# EAGLE board protoAndPower (EAGLE 9.2.2)
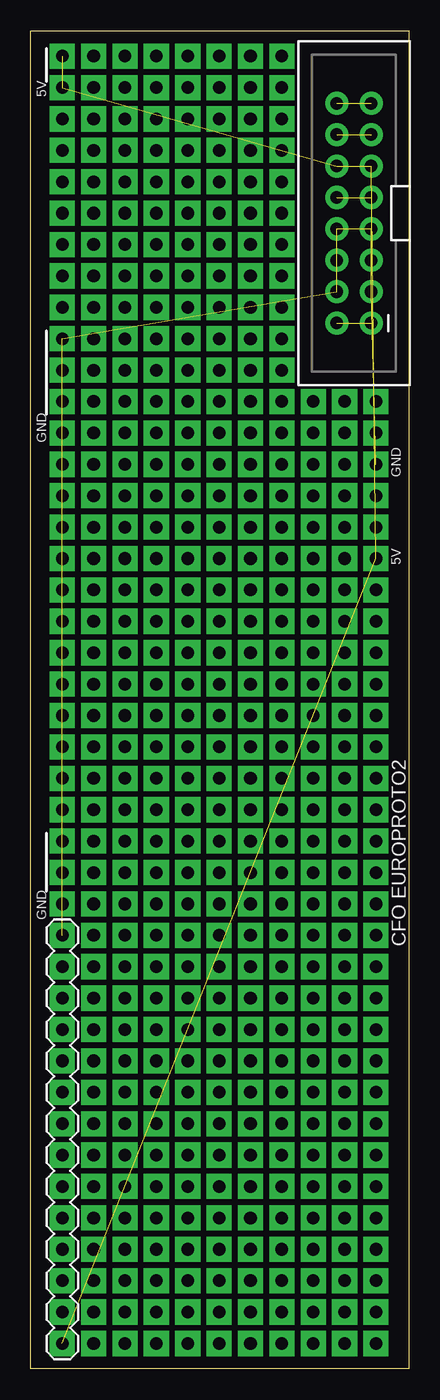
[diagram p0: board, top side]
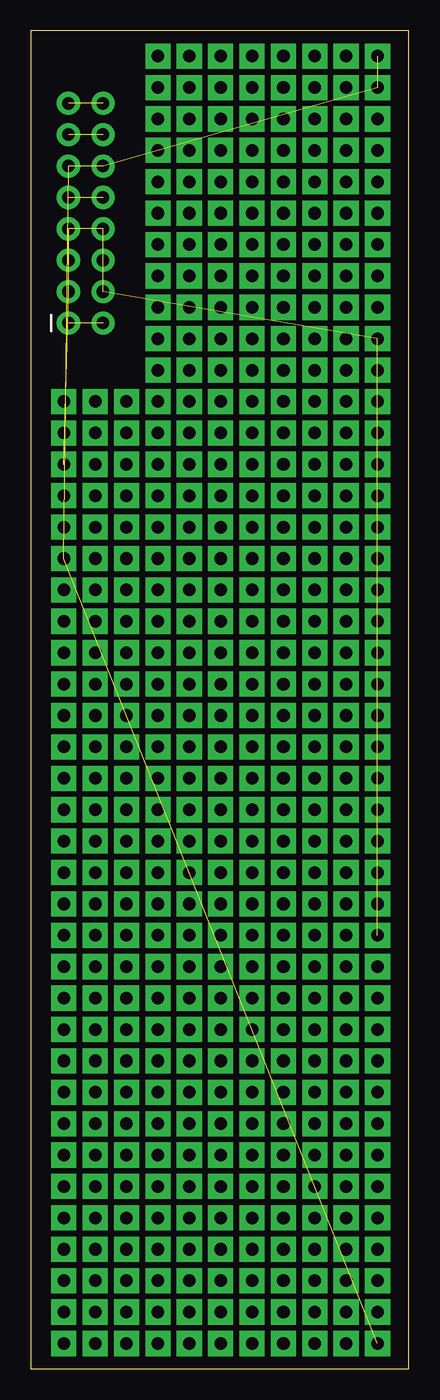
[diagram p1: board, bottom side, seen from below]

Size 30.61 x 108.22 mm. Coordinates in mm from the lower left corner, seen from the top.
Outline: 30.61,0 0,0 0,108.22 30.61,108.22 30.61,0
Copper layers (1*16): Top 0.035mm / dielectric 1.5mm / Bottom 0.035mm
Design rules "default": minimum track width 6mil, minimum drill 0.35mm, track to track 6mil, track to pad 6mil, pad to pad 6mil, via to via 6mil, smd to smd 6mil, copper to edge 40mil, drill to drill 6mil, minimum pad ring 10mil, minimum via ring 8mil, stop-mask expansion 4mil, vias tented up to drill 0mil, thermal gap 10mil

## Footprints (pad centres in the part's own frame; a part is rotated, then mirrored left to right if it is on the bottom)
1X04 = drill 1.016 pad 2.032 square: 1 0,0; 2 2.54,0; 3 5.08,0; 4 7.62,0
1X14 = drill 1.016 pad 2.032 square: 1 0,0; 2 2.54,0; 3 5.08,0; 4 7.62,0; 5 10.16,0; 6 12.7,0; 7 15.24,0; 8 17.78,0; 9 20.32,0; 10 22.86,0; 11 25.4,0; 12 27.94,0; 13 30.48,0; 14 33.02,0
2X8-SHROUDED_LOCK = drill 1.016 pad 1.88: 1 -1.397,8.89; 2 1.397,8.89; 3 -1.397,6.35; 4 1.397,6.35; 5 -1.397,3.81; 6 1.397,3.81; 7 -1.397,1.27; 8 1.397,1.27; 9 -1.397,-1.27; 10 1.397,-1.27; 11 -1.397,-3.81; 12 1.397,-3.81; 13 -1.397,-6.35; 14 1.397,-6.35; 15 -1.397,-8.89; 16 1.397,-8.89
1X01 = drill 1.016 pad 2.032 square: 1 0,0

## Placement (x,y rotation side)
J1  [1X04]  27.94,73.15 270 top
J2  [1X14]  2.54,35.05 270 top
J3  [2X8-SHROUDED_LOCK]  26.16,93.47 180 top
J4  [1X01]  2.54,106.17 0 top
J5  [1X01]  2.54,103.63 0 top
J28  [1X01]  2.54,83.31 0 top
J29  [1X01]  2.54,42.67 0 top
J31  [1X01]  2.54,80.77 0 top
J34  [1X01]  2.54,78.23 0 top
J37  [1X01]  2.54,75.69 0 top
J39  [1X01]  2.54,40.13 0 top
J42  [1X01]  2.54,37.59 0 top

## Library data of the parts
J1 = CFO; PROD_ID: CONN-09696; SPICEPREFIX: E
J2 = CFO; SPICEPREFIX: X
J3-J5 J28 J29 J31 J34 J37 J39 J42 = CFO

## Nets
5V: J1.4 J2.14 J3.11 J3.12 J4.1 J5.1
12V: J3.9 J3.10
CV: J3.13 J3.14
GATE: J3.15 J3.16
GND: J1.1 J2.1 J3.3 J3.4 J3.5 J3.6 J3.7 J3.8 J28.1 J29.1 J31.1 J34.1 J37.1 J39.1 J42.1
N$185: J1.3
N$186: J1.2
POT1: J2.2
POT2: J2.3
POT3: J2.4
VEE: J3.1 J3.2

## Tracks (layer width: path | path; a pad name or v marks a point on that pad's centre or on a via)
5V  (5 unrouted)
12V  (1 unrouted)
CV  (1 unrouted)
GATE  (1 unrouted)
GND  (14 unrouted)
N$1  (via drill 1.02 pad 2.03)
  other vias: 2.54,73.15
N$2  (via drill 1.02 pad 2.03)
  other vias: 5.08,73.15
N$3  (via drill 1.02 pad 2.03)
  other vias: 5.08,2.03
N$4  (via drill 1.02 pad 2.03)
  other vias: 7.62,73.15
N$5  (via drill 1.02 pad 2.03)
  other vias: 7.62,2.03
N$6  (via drill 1.02 pad 2.03)
  other vias: 10.16,2.03
N$7  (via drill 1.02 pad 2.03)
  other vias: 10.16,4.57
N$8  (via drill 1.02 pad 2.03)
  other vias: 7.62,4.57
N$9  (via drill 1.02 pad 2.03)
  other vias: 10.16,73.15
N$10  (via drill 1.02 pad 2.03)
  other vias: 5.08,4.57
N$11  (via drill 1.02 pad 2.03)
  other vias: 5.08,7.11
N$12  (via drill 1.02 pad 2.03)
  other vias: 7.62,7.11
N$13  (via drill 1.02 pad 2.03)
  other vias: 10.16,7.11
N$14  (via drill 1.02 pad 2.03)
  other vias: 10.16,9.65
N$15  (via drill 1.02 pad 2.03)
  other vias: 7.62,9.65
N$16  (via drill 1.02 pad 2.03)
  other vias: 5.08,9.65
N$17  (via drill 1.02 pad 2.03)
  other vias: 5.08,12.19
N$18  (via drill 1.02 pad 2.03)
  other vias: 7.62,12.19
N$19  (via drill 1.02 pad 2.03)
  other vias: 10.16,12.19
N$20  (via drill 1.02 pad 2.03)
  other vias: 10.16,14.73
N$21  (via drill 1.02 pad 2.03)
  other vias: 7.62,14.73
N$22  (via drill 1.02 pad 2.03)
  other vias: 5.08,14.73
N$23  (via drill 1.02 pad 2.03)
  other vias: 5.08,17.27
N$24  (via drill 1.02 pad 2.03)
  other vias: 7.62,17.27
N$25  (via drill 1.02 pad 2.03)
  other vias: 10.16,17.27
N$26  (via drill 1.02 pad 2.03)
  other vias: 10.16,19.81
N$27  (via drill 1.02 pad 2.03)
  other vias: 7.62,19.81
N$28  (via drill 1.02 pad 2.03)
  other vias: 5.08,19.81
N$29  (via drill 1.02 pad 2.03)
  other vias: 5.08,22.35
N$30  (via drill 1.02 pad 2.03)
  other vias: 7.62,22.35
N$31  (via drill 1.02 pad 2.03)
  other vias: 10.16,22.35
N$32  (via drill 1.02 pad 2.03)
  other vias: 10.16,24.89
N$33  (via drill 1.02 pad 2.03)
  other vias: 7.62,24.89
N$34  (via drill 1.02 pad 2.03)
  other vias: 5.08,24.89
N$35  (via drill 1.02 pad 2.03)
  other vias: 5.08,27.43
N$36  (via drill 1.02 pad 2.03)
  other vias: 7.62,27.43
N$37  (via drill 1.02 pad 2.03)
  other vias: 10.16,27.43
N$38  (via drill 1.02 pad 2.03)
  other vias: 10.16,29.97
N$39  (via drill 1.02 pad 2.03)
  other vias: 7.62,29.97
N$40  (via drill 1.02 pad 2.03)
  other vias: 5.08,29.97
N$41  (via drill 1.02 pad 2.03)
  other vias: 5.08,32.51
N$42  (via drill 1.02 pad 2.03)
  other vias: 7.62,32.51
N$43  (via drill 1.02 pad 2.03)
  other vias: 10.16,32.51
N$44  (via drill 1.02 pad 2.03)
  other vias: 10.16,35.05
N$45  (via drill 1.02 pad 2.03)
  other vias: 7.62,35.05
N$46  (via drill 1.02 pad 2.03)
  other vias: 5.08,35.05
N$47  (via drill 1.02 pad 2.03)
  other vias: 5.08,37.59
N$48  (via drill 1.02 pad 2.03)
  other vias: 7.62,37.59
N$49  (via drill 1.02 pad 2.03)
  other vias: 10.16,37.59
N$50  (via drill 1.02 pad 2.03)
  other vias: 10.16,40.13
N$51  (via drill 1.02 pad 2.03)
  other vias: 7.62,40.13
N$52  (via drill 1.02 pad 2.03)
  other vias: 5.08,40.13
N$53  (via drill 1.02 pad 2.03)
  other vias: 5.08,42.67
N$54  (via drill 1.02 pad 2.03)
  other vias: 7.62,42.67
N$55  (via drill 1.02 pad 2.03)
  other vias: 10.16,42.67
N$56  (via drill 1.02 pad 2.03)
  other vias: 10.16,45.21
N$57  (via drill 1.02 pad 2.03)
  other vias: 7.62,45.21
N$58  (via drill 1.02 pad 2.03)
  other vias: 5.08,45.21
N$59  (via drill 1.02 pad 2.03)
  other vias: 2.54,45.21
N$60  (via drill 1.02 pad 2.03)
  other vias: 2.54,47.75
N$61  (via drill 1.02 pad 2.03)
  other vias: 5.08,47.75
N$62  (via drill 1.02 pad 2.03)
  other vias: 7.62,47.75
N$63  (via drill 1.02 pad 2.03)
  other vias: 10.16,47.75
N$64  (via drill 1.02 pad 2.03)
  other vias: 10.16,50.29
N$65  (via drill 1.02 pad 2.03)
  other vias: 7.62,50.29
N$66  (via drill 1.02 pad 2.03)
  other vias: 5.08,50.29
N$67  (via drill 1.02 pad 2.03)
  other vias: 2.54,50.29
N$68  (via drill 1.02 pad 2.03)
  other vias: 22.86,17.27
N$69  (via drill 1.02 pad 2.03)
  other vias: 22.86,14.73
N$70  (via drill 1.02 pad 2.03)
  other vias: 25.4,14.73
N$71  (via drill 1.02 pad 2.03)
  other vias: 25.4,17.27
N$72  (via drill 1.02 pad 2.03)
  other vias: 25.4,19.81
N$73  (via drill 1.02 pad 2.03)
  other vias: 22.86,19.81
N$74  (via drill 1.02 pad 2.03)
  other vias: 22.86,22.35
N$75  (via drill 1.02 pad 2.03)
  other vias: 25.4,22.35
N$76  (via drill 1.02 pad 2.03)
  other vias: 25.4,24.89
N$77  (via drill 1.02 pad 2.03)
  other vias: 22.86,24.89
N$78  (via drill 1.02 pad 2.03)
  other vias: 22.86,27.43
N$79  (via drill 1.02 pad 2.03)
  other vias: 25.4,27.43
N$80  (via drill 1.02 pad 2.03)
  other vias: 25.4,29.97
N$81  (via drill 1.02 pad 2.03)
  other vias: 22.86,29.97
N$82  (via drill 1.02 pad 2.03)
  other vias: 22.86,32.51
N$83  (via drill 1.02 pad 2.03)
  other vias: 12.7,73.15
N$84  (via drill 1.02 pad 2.03)
  other vias: 25.4,32.51
N$85  (via drill 1.02 pad 2.03)
  other vias: 25.4,35.05
N$86  (via drill 1.02 pad 2.03)
  other vias: 22.86,35.05
N$87  (via drill 1.02 pad 2.03)
  other vias: 27.94,35.05
N$88  (via drill 1.02 pad 2.03)
  other vias: 27.94,37.59
N$89  (via drill 1.02 pad 2.03)
  other vias: 25.4,37.59
N$90  (via drill 1.02 pad 2.03)
  other vias: 22.86,37.59
N$91  (via drill 1.02 pad 2.03)
  other vias: 22.86,40.13
N$92  (via drill 1.02 pad 2.03)
  other vias: 25.4,40.13
N$93  (via drill 1.02 pad 2.03)
  other vias: 27.94,40.13
N$94  (via drill 1.02 pad 2.03)
  other vias: 27.94,42.67
N$95  (via drill 1.02 pad 2.03)
  other vias: 25.4,42.67
N$96  (via drill 1.02 pad 2.03)
  other vias: 22.86,42.67
N$97  (via drill 1.02 pad 2.03)
  other vias: 22.86,45.21
N$98  (via drill 1.02 pad 2.03)
  other vias: 25.4,45.21
N$99  (via drill 1.02 pad 2.03)
  other vias: 27.94,45.21
N$100  (via drill 1.02 pad 2.03)
  other vias: 27.94,47.75
N$101  (via drill 1.02 pad 2.03)
  other vias: 25.4,47.75
N$102  (via drill 1.02 pad 2.03)
  other vias: 22.86,47.75
N$103  (via drill 1.02 pad 2.03)
  other vias: 22.86,50.29
N$104  (via drill 1.02 pad 2.03)
  other vias: 25.4,50.29
N$105  (via drill 1.02 pad 2.03)
  other vias: 27.94,50.29
N$106  (via drill 1.02 pad 2.03)
  other vias: 25.4,12.19
N$107  (via drill 1.02 pad 2.03)
  other vias: 25.4,9.65
N$108  (via drill 1.02 pad 2.03)
  other vias: 5.08,106.17
N$109  (via drill 1.02 pad 2.03)
  other vias: 7.62,106.17
N$110  (via drill 1.02 pad 2.03)
  other vias: 10.16,106.17
N$111  (via drill 1.02 pad 2.03)
  other vias: 12.7,106.17
N$112  (via drill 1.02 pad 2.03)
  other vias: 15.24,106.17
N$113  (via drill 1.02 pad 2.03)
  other vias: 17.78,106.17
N$114  (via drill 1.02 pad 2.03)
  other vias: 20.32,106.17
N$115  (via drill 1.02 pad 2.03)
  other vias: 20.32,103.63
N$116  (via drill 1.02 pad 2.03)
  other vias: 17.78,103.63
N$117  (via drill 1.02 pad 2.03)
  other vias: 15.24,103.63
N$118  (via drill 1.02 pad 2.03)
  other vias: 12.7,103.63
N$119  (via drill 1.02 pad 2.03)
  other vias: 10.16,103.63
N$120  (via drill 1.02 pad 2.03)
  other vias: 7.62,103.63
N$121  (via drill 1.02 pad 2.03)
  other vias: 5.08,103.63
N$122  (via drill 1.02 pad 2.03)
  other vias: 5.08,101.09
N$123  (via drill 1.02 pad 2.03)
  other vias: 7.62,101.09
N$124  (via drill 1.02 pad 2.03)
  other vias: 10.16,101.09
N$125  (via drill 1.02 pad 2.03)
  other vias: 12.7,101.09
N$126  (via drill 1.02 pad 2.03)
  other vias: 15.24,101.09
N$127  (via drill 1.02 pad 2.03)
  other vias: 17.78,101.09
N$128  (via drill 1.02 pad 2.03)
  other vias: 20.32,101.09
N$129  (via drill 1.02 pad 2.03)
  other vias: 2.54,98.55
N$130  (via drill 1.02 pad 2.03)
  other vias: 5.08,96.01
N$131  (via drill 1.02 pad 2.03)
  other vias: 5.08,98.55
N$132  (via drill 1.02 pad 2.03)
  other vias: 2.54,101.09
N$133  (via drill 1.02 pad 2.03)
  other vias: 7.62,98.55
N$134  (via drill 1.02 pad 2.03)
  other vias: 10.16,98.55
N$135  (via drill 1.02 pad 2.03)
  other vias: 12.7,98.55
N$136  (via drill 1.02 pad 2.03)
  other vias: 15.24,98.55
N$137  (via drill 1.02 pad 2.03)
  other vias: 17.78,98.55
N$138  (via drill 1.02 pad 2.03)
  other vias: 20.32,98.55
N$139  (via drill 1.02 pad 2.03)
  other vias: 20.32,96.01
N$140  (via drill 1.02 pad 2.03)
  other vias: 17.78,96.01
N$141  (via drill 1.02 pad 2.03)
  other vias: 15.24,96.01
N$142  (via drill 1.02 pad 2.03)
  other vias: 12.7,96.01
N$143  (via drill 1.02 pad 2.03)
  other vias: 10.16,96.01
N$144  (via drill 1.02 pad 2.03)
  other vias: 7.62,96.01
N$145  (via drill 1.02 pad 2.03)
  other vias: 2.54,93.47
N$146  (via drill 1.02 pad 2.03)
  other vias: 2.54,96.01
N$147  (via drill 1.02 pad 2.03)
  other vias: 5.08,93.47
N$148  (via drill 1.02 pad 2.03)
  other vias: 7.62,93.47
N$149  (via drill 1.02 pad 2.03)
  other vias: 10.16,93.47
N$150  (via drill 1.02 pad 2.03)
  other vias: 12.7,93.47
N$151  (via drill 1.02 pad 2.03)
  other vias: 15.24,93.47
N$152  (via drill 1.02 pad 2.03)
  other vias: 17.78,93.47
N$153  (via drill 1.02 pad 2.03)
  other vias: 20.32,93.47
N$154  (via drill 1.02 pad 2.03)
  other vias: 20.32,90.93
N$155  (via drill 1.02 pad 2.03)
  other vias: 17.78,90.93
N$156  (via drill 1.02 pad 2.03)
  other vias: 15.24,90.93
N$157  (via drill 1.02 pad 2.03)
  other vias: 12.7,90.93
N$158  (via drill 1.02 pad 2.03)
  other vias: 10.16,90.93
N$159  (via drill 1.02 pad 2.03)
  other vias: 7.62,90.93
N$160  (via drill 1.02 pad 2.03)
  other vias: 5.08,90.93
N$161  (via drill 1.02 pad 2.03)
  other vias: 2.54,90.93
N$162  (via drill 1.02 pad 2.03)
  other vias: 2.54,88.39
N$163  (via drill 1.02 pad 2.03)
  other vias: 5.08,88.39
N$164  (via drill 1.02 pad 2.03)
  other vias: 7.62,88.39
N$165  (via drill 1.02 pad 2.03)
  other vias: 10.16,88.39
N$166  (via drill 1.02 pad 2.03)
  other vias: 12.7,88.39
N$167  (via drill 1.02 pad 2.03)
  other vias: 15.24,88.39
N$168  (via drill 1.02 pad 2.03)
  other vias: 17.78,88.39
N$169  (via drill 1.02 pad 2.03)
  other vias: 20.32,88.39
N$170  (via drill 1.02 pad 2.03)
  other vias: 20.32,85.85
N$171  (via drill 1.02 pad 2.03)
  other vias: 17.78,85.85
N$172  (via drill 1.02 pad 2.03)
  other vias: 15.24,85.85
N$173  (via drill 1.02 pad 2.03)
  other vias: 12.7,85.85
N$174  (via drill 1.02 pad 2.03)
  other vias: 10.16,85.85
N$175  (via drill 1.02 pad 2.03)
  other vias: 7.62,85.85
N$176  (via drill 1.02 pad 2.03)
  other vias: 5.08,85.85
N$177  (via drill 1.02 pad 2.03)
  other vias: 2.54,85.85
N$178  (via drill 1.02 pad 2.03)
  other vias: 5.08,83.31
N$179  (via drill 1.02 pad 2.03)
  other vias: 7.62,83.31
N$180  (via drill 1.02 pad 2.03)
  other vias: 10.16,83.31
N$181  (via drill 1.02 pad 2.03)
  other vias: 12.7,83.31
N$182  (via drill 1.02 pad 2.03)
  other vias: 15.24,83.31
N$183  (via drill 1.02 pad 2.03)
  other vias: 17.78,83.31
N$184  (via drill 1.02 pad 2.03)
  other vias: 20.32,83.31
N$187  (via drill 1.02 pad 2.03)
  other vias: 20.32,80.77
N$188  (via drill 1.02 pad 2.03)
  other vias: 17.78,80.77
N$189  (via drill 1.02 pad 2.03)
  other vias: 15.24,80.77
N$190  (via drill 1.02 pad 2.03)
  other vias: 12.7,80.77
N$191  (via drill 1.02 pad 2.03)
  other vias: 10.16,80.77
N$192  (via drill 1.02 pad 2.03)
  other vias: 7.62,80.77
N$193  (via drill 1.02 pad 2.03)
  other vias: 5.08,80.77
N$194  (via drill 1.02 pad 2.03)
  other vias: 5.08,78.23
N$195  (via drill 1.02 pad 2.03)
  other vias: 7.62,78.23
N$196  (via drill 1.02 pad 2.03)
  other vias: 10.16,78.23
N$197  (via drill 1.02 pad 2.03)
  other vias: 12.7,78.23
N$198  (via drill 1.02 pad 2.03)
  other vias: 15.24,78.23
N$199  (via drill 1.02 pad 2.03)
  other vias: 17.78,78.23
N$200  (via drill 1.02 pad 2.03)
  other vias: 20.32,78.23
N$201  (via drill 1.02 pad 2.03)
  other vias: 22.86,78.23
N$202  (via drill 1.02 pad 2.03)
  other vias: 27.94,78.23
N$203  (via drill 1.02 pad 2.03)
  other vias: 25.4,78.23
N$204  (via drill 1.02 pad 2.03)
  other vias: 27.94,75.69
N$205  (via drill 1.02 pad 2.03)
  other vias: 22.86,75.69
N$206  (via drill 1.02 pad 2.03)
  other vias: 25.4,75.69
N$207  (via drill 1.02 pad 2.03)
  other vias: 20.32,75.69
N$208  (via drill 1.02 pad 2.03)
  other vias: 17.78,75.69
N$209  (via drill 1.02 pad 2.03)
  other vias: 15.24,75.69
N$210  (via drill 1.02 pad 2.03)
  other vias: 12.7,75.69
N$211  (via drill 1.02 pad 2.03)
  other vias: 10.16,75.69
N$212  (via drill 1.02 pad 2.03)
  other vias: 5.08,75.69
N$213  (via drill 1.02 pad 2.03)
  other vias: 7.62,75.69
N$214  (via drill 1.02 pad 2.03)
  other vias: 15.24,73.15
N$215  (via drill 1.02 pad 2.03)
  other vias: 17.78,73.15
N$216  (via drill 1.02 pad 2.03)
  other vias: 20.32,73.15
N$217  (via drill 1.02 pad 2.03)
  other vias: 22.86,73.15
N$218  (via drill 1.02 pad 2.03)
  other vias: 25.4,73.15
N$219  (via drill 1.02 pad 2.03)
  other vias: 25.4,70.61
N$220  (via drill 1.02 pad 2.03)
  other vias: 22.86,70.61
N$221  (via drill 1.02 pad 2.03)
  other vias: 20.32,70.61
N$222  (via drill 1.02 pad 2.03)
  other vias: 17.78,70.61
N$223  (via drill 1.02 pad 2.03)
  other vias: 15.24,70.61
N$224  (via drill 1.02 pad 2.03)
  other vias: 12.7,70.61
N$225  (via drill 1.02 pad 2.03)
  other vias: 10.16,70.61
N$226  (via drill 1.02 pad 2.03)
  other vias: 7.62,70.61
N$227  (via drill 1.02 pad 2.03)
  other vias: 5.08,70.61
N$228  (via drill 1.02 pad 2.03)
  other vias: 2.54,70.61
N$229  (via drill 1.02 pad 2.03)
  other vias: 2.54,68.07
N$230  (via drill 1.02 pad 2.03)
  other vias: 5.08,68.07
N$231  (via drill 1.02 pad 2.03)
  other vias: 7.62,68.07
N$232  (via drill 1.02 pad 2.03)
  other vias: 10.16,68.07
N$233  (via drill 1.02 pad 2.03)
  other vias: 12.7,68.07
N$234  (via drill 1.02 pad 2.03)
  other vias: 15.24,68.07
N$235  (via drill 1.02 pad 2.03)
  other vias: 17.78,68.07
N$236  (via drill 1.02 pad 2.03)
  other vias: 20.32,68.07
N$237  (via drill 1.02 pad 2.03)
  other vias: 22.86,68.07
N$238  (via drill 1.02 pad 2.03)
  other vias: 25.4,68.07
N$239  (via drill 1.02 pad 2.03)
  other vias: 25.4,65.53
N$240  (via drill 1.02 pad 2.03)
  other vias: 22.86,65.53
N$241  (via drill 1.02 pad 2.03)
  other vias: 20.32,65.53
N$242  (via drill 1.02 pad 2.03)
  other vias: 17.78,65.53
N$243  (via drill 1.02 pad 2.03)
  other vias: 15.24,65.53
N$244  (via drill 1.02 pad 2.03)
  other vias: 10.16,65.53
N$245  (via drill 1.02 pad 2.03)
  other vias: 12.7,65.53
N$246  (via drill 1.02 pad 2.03)
  other vias: 7.62,65.53
N$247  (via drill 1.02 pad 2.03)
  other vias: 5.08,65.53
N$248  (via drill 1.02 pad 2.03)
  other vias: 2.54,65.53
N$249  (via drill 1.02 pad 2.03)
  other vias: 2.54,62.99
N$250  (via drill 1.02 pad 2.03)
  other vias: 5.08,62.99
N$251  (via drill 1.02 pad 2.03)
  other vias: 7.62,62.99
N$252  (via drill 1.02 pad 2.03)
  other vias: 10.16,62.99
N$253  (via drill 1.02 pad 2.03)
  other vias: 12.7,62.99
N$254  (via drill 1.02 pad 2.03)
  other vias: 15.24,62.99
N$255  (via drill 1.02 pad 2.03)
  other vias: 17.78,62.99
N$256  (via drill 1.02 pad 2.03)
  other vias: 20.32,62.99
N$257  (via drill 1.02 pad 2.03)
  other vias: 22.86,62.99
N$258  (via drill 1.02 pad 2.03)
  other vias: 25.4,62.99
N$259  (via drill 1.02 pad 2.03)
  other vias: 2.54,60.45
N$260  (via drill 1.02 pad 2.03)
  other vias: 5.08,60.45
N$261  (via drill 1.02 pad 2.03)
  other vias: 7.62,60.45
N$262  (via drill 1.02 pad 2.03)
  other vias: 10.16,60.45
N$263  (via drill 1.02 pad 2.03)
  other vias: 12.7,60.45
N$264  (via drill 1.02 pad 2.03)
  other vias: 15.24,60.45
N$265  (via drill 1.02 pad 2.03)
  other vias: 17.78,60.45
N$266  (via drill 1.02 pad 2.03)
  other vias: 20.32,60.45
N$267  (via drill 1.02 pad 2.03)
  other vias: 22.86,60.45
N$268  (via drill 1.02 pad 2.03)
  other vias: 25.4,60.45
N$269  (via drill 1.02 pad 2.03)
  other vias: 27.94,60.45
N$270  (via drill 1.02 pad 2.03)
  other vias: 27.94,62.99
N$271  (via drill 1.02 pad 2.03)
  other vias: 27.94,57.91
N$272  (via drill 1.02 pad 2.03)
  other vias: 25.4,57.91
N$273  (via drill 1.02 pad 2.03)
  other vias: 22.86,57.91
N$274  (via drill 1.02 pad 2.03)
  other vias: 20.32,57.91
N$275  (via drill 1.02 pad 2.03)
  other vias: 17.78,57.91
N$276  (via drill 1.02 pad 2.03)
  other vias: 15.24,57.91
N$277  (via drill 1.02 pad 2.03)
  other vias: 12.7,57.91
N$278  (via drill 1.02 pad 2.03)
  other vias: 10.16,57.91
N$279  (via drill 1.02 pad 2.03)
  other vias: 7.62,57.91
N$280  (via drill 1.02 pad 2.03)
  other vias: 5.08,57.91
N$281  (via drill 1.02 pad 2.03)
  other vias: 2.54,57.91
N$282  (via drill 1.02 pad 2.03)
  other vias: 2.54,55.37
N$283  (via drill 1.02 pad 2.03)
  other vias: 5.08,55.37
N$284  (via drill 1.02 pad 2.03)
  other vias: 7.62,55.37
N$285  (via drill 1.02 pad 2.03)
  other vias: 10.16,55.37
N$286  (via drill 1.02 pad 2.03)
  other vias: 12.7,55.37
N$287  (via drill 1.02 pad 2.03)
  other vias: 15.24,55.37
N$288  (via drill 1.02 pad 2.03)
  other vias: 17.78,55.37
N$289  (via drill 1.02 pad 2.03)
  other vias: 20.32,55.37
N$290  (via drill 1.02 pad 2.03)
  other vias: 22.86,55.37
N$291  (via drill 1.02 pad 2.03)
  other vias: 25.4,55.37
N$292  (via drill 1.02 pad 2.03)
  other vias: 27.94,55.37
N$293  (via drill 1.02 pad 2.03)
  other vias: 27.94,52.83
N$294  (via drill 1.02 pad 2.03)
  other vias: 25.4,52.83
N$295  (via drill 1.02 pad 2.03)
  other vias: 22.86,52.83
N$296  (via drill 1.02 pad 2.03)
  other vias: 20.32,52.83
N$297  (via drill 1.02 pad 2.03)
  other vias: 17.78,52.83
N$298  (via drill 1.02 pad 2.03)
  other vias: 15.24,52.83
N$299  (via drill 1.02 pad 2.03)
  other vias: 12.7,52.83
N$300  (via drill 1.02 pad 2.03)
  other vias: 10.16,52.83
N$301  (via drill 1.02 pad 2.03)
  other vias: 7.62,52.83
N$302  (via drill 1.02 pad 2.03)
  other vias: 5.08,52.83
N$303  (via drill 1.02 pad 2.03)
  other vias: 2.54,52.83
N$304  (via drill 1.02 pad 2.03)
  other vias: 12.7,50.29
N$305  (via drill 1.02 pad 2.03)
  other vias: 15.24,50.29
N$306  (via drill 1.02 pad 2.03)
  other vias: 17.78,50.29
N$307  (via drill 1.02 pad 2.03)
  other vias: 20.32,50.29
N$308  (via drill 1.02 pad 2.03)
  other vias: 20.32,47.75
N$309  (via drill 1.02 pad 2.03)
  other vias: 20.32,45.21
N$310  (via drill 1.02 pad 2.03)
  other vias: 20.32,42.67
N$311  (via drill 1.02 pad 2.03)
  other vias: 20.32,40.13
N$312  (via drill 1.02 pad 2.03)
  other vias: 20.32,35.05
N$313  (via drill 1.02 pad 2.03)
  other vias: 20.32,37.59
N$314  (via drill 1.02 pad 2.03)
  other vias: 17.78,47.75
N$315  (via drill 1.02 pad 2.03)
  other vias: 17.78,45.21
N$316  (via drill 1.02 pad 2.03)
  other vias: 17.78,42.67
N$317  (via drill 1.02 pad 2.03)
  other vias: 17.78,40.13
N$318  (via drill 1.02 pad 2.03)
  other vias: 17.78,37.59
N$319  (via drill 1.02 pad 2.03)
  other vias: 17.78,35.05
N$320  (via drill 1.02 pad 2.03)
  other vias: 15.24,47.75
N$321  (via drill 1.02 pad 2.03)
  other vias: 15.24,45.21
N$322  (via drill 1.02 pad 2.03)
  other vias: 15.24,42.67
N$323  (via drill 1.02 pad 2.03)
  other vias: 15.24,40.13
N$324  (via drill 1.02 pad 2.03)
  other vias: 15.24,37.59
N$325  (via drill 1.02 pad 2.03)
  other vias: 15.24,35.05
N$326  (via drill 1.02 pad 2.03)
  other vias: 12.7,47.75
N$327  (via drill 1.02 pad 2.03)
  other vias: 12.7,45.21
N$328  (via drill 1.02 pad 2.03)
  other vias: 12.7,42.67
N$329  (via drill 1.02 pad 2.03)
  other vias: 12.7,40.13
N$330  (via drill 1.02 pad 2.03)
  other vias: 12.7,37.59
N$331  (via drill 1.02 pad 2.03)
  other vias: 12.7,35.05
N$332  (via drill 1.02 pad 2.03)
  other vias: 12.7,32.51
N$333  (via drill 1.02 pad 2.03)
  other vias: 15.24,32.51
N$334  (via drill 1.02 pad 2.03)
  other vias: 17.78,32.51
N$335  (via drill 1.02 pad 2.03)
  other vias: 20.32,32.51
N$336  (via drill 1.02 pad 2.03)
  other vias: 20.32,29.97
N$337  (via drill 1.02 pad 2.03)
  other vias: 17.78,27.43
N$338  (via drill 1.02 pad 2.03)
  other vias: 17.78,29.97
N$339  (via drill 1.02 pad 2.03)
  other vias: 15.24,29.97
N$340  (via drill 1.02 pad 2.03)
  other vias: 12.7,29.97
N$341  (via drill 1.02 pad 2.03)
  other vias: 12.7,27.43
N$342  (via drill 1.02 pad 2.03)
  other vias: 15.24,27.43
N$343  (via drill 1.02 pad 2.03)
  other vias: 20.32,27.43
N$344  (via drill 1.02 pad 2.03)
  other vias: 20.32,24.89
N$345  (via drill 1.02 pad 2.03)
  other vias: 17.78,24.89
N$346  (via drill 1.02 pad 2.03)
  other vias: 15.24,24.89
N$347  (via drill 1.02 pad 2.03)
  other vias: 12.7,24.89
N$348  (via drill 1.02 pad 2.03)
  other vias: 12.7,22.35
N$349  (via drill 1.02 pad 2.03)
  other vias: 15.24,22.35
N$350  (via drill 1.02 pad 2.03)
  other vias: 17.78,22.35
N$351  (via drill 1.02 pad 2.03)
  other vias: 20.32,22.35
N$352  (via drill 1.02 pad 2.03)
  other vias: 20.32,19.81
N$353  (via drill 1.02 pad 2.03)
  other vias: 17.78,19.81
N$354  (via drill 1.02 pad 2.03)
  other vias: 15.24,19.81
N$355  (via drill 1.02 pad 2.03)
  other vias: 12.7,19.81
N$356  (via drill 1.02 pad 2.03)
  other vias: 12.7,17.27
N$357  (via drill 1.02 pad 2.03)
  other vias: 15.24,17.27
N$358  (via drill 1.02 pad 2.03)
  other vias: 17.78,17.27
N$359  (via drill 1.02 pad 2.03)
  other vias: 20.32,17.27
N$360  (via drill 1.02 pad 2.03)
  other vias: 20.32,14.73
N$361  (via drill 1.02 pad 2.03)
  other vias: 17.78,14.73
N$362  (via drill 1.02 pad 2.03)
  other vias: 15.24,14.73
N$363  (via drill 1.02 pad 2.03)
  other vias: 12.7,14.73
N$364  (via drill 1.02 pad 2.03)
  other vias: 12.7,12.19
N$365  (via drill 1.02 pad 2.03)
  other vias: 15.24,12.19
N$366  (via drill 1.02 pad 2.03)
  other vias: 17.78,12.19
N$367  (via drill 1.02 pad 2.03)
  other vias: 20.32,12.19
N$368  (via drill 1.02 pad 2.03)
  other vias: 22.86,12.19
N$369  (via drill 1.02 pad 2.03)
  other vias: 22.86,9.65
N$370  (via drill 1.02 pad 2.03)
  other vias: 20.32,9.65
N$371  (via drill 1.02 pad 2.03)
  other vias: 17.78,9.65
N$372  (via drill 1.02 pad 2.03)
  other vias: 15.24,9.65
N$373  (via drill 1.02 pad 2.03)
  other vias: 12.7,9.65
N$374  (via drill 1.02 pad 2.03)
  other vias: 12.7,7.11
N$375  (via drill 1.02 pad 2.03)
  other vias: 17.78,7.11
N$376  (via drill 1.02 pad 2.03)
  other vias: 15.24,7.11
N$377  (via drill 1.02 pad 2.03)
  other vias: 20.32,7.11
N$378  (via drill 1.02 pad 2.03)
  other vias: 22.86,7.11
N$379  (via drill 1.02 pad 2.03)
  other vias: 25.4,7.11
N$380  (via drill 1.02 pad 2.03)
  other vias: 25.4,4.57
N$381  (via drill 1.02 pad 2.03)
  other vias: 22.86,4.57
N$382  (via drill 1.02 pad 2.03)
  other vias: 20.32,4.57
N$383  (via drill 1.02 pad 2.03)
  other vias: 17.78,4.57
N$384  (via drill 1.02 pad 2.03)
  other vias: 15.24,4.57
N$385  (via drill 1.02 pad 2.03)
  other vias: 12.7,4.57
N$386  (via drill 1.02 pad 2.03)
  other vias: 12.7,2.03
N$387  (via drill 1.02 pad 2.03)
  other vias: 15.24,2.03
N$388  (via drill 1.02 pad 2.03)
  other vias: 17.78,2.03
N$389  (via drill 1.02 pad 2.03)
  other vias: 22.86,2.03
N$390  (via drill 1.02 pad 2.03)
  other vias: 20.32,2.03
N$391  (via drill 1.02 pad 2.03)
  other vias: 25.4,2.03
N$392  (via drill 1.02 pad 2.03)
  other vias: 27.94,2.03
N$393  (via drill 1.02 pad 2.03)
  other vias: 27.94,4.57
N$394  (via drill 1.02 pad 2.03)
  other vias: 27.94,7.11
N$395  (via drill 1.02 pad 2.03)
  other vias: 27.94,9.65
N$396  (via drill 1.02 pad 2.03)
  other vias: 27.94,12.19
N$397  (via drill 1.02 pad 2.03)
  other vias: 27.94,14.73
N$398  (via drill 1.02 pad 2.03)
  other vias: 27.94,17.27
N$399  (via drill 1.02 pad 2.03)
  other vias: 27.94,19.81
N$400  (via drill 1.02 pad 2.03)
  other vias: 27.94,22.35
N$401  (via drill 1.02 pad 2.03)
  other vias: 27.94,24.89
N$402  (via drill 1.02 pad 2.03)
  other vias: 27.94,27.43
N$403  (via drill 1.02 pad 2.03)
  other vias: 27.94,29.97
N$404  (via drill 1.02 pad 2.03)
  other vias: 27.94,32.51
VEE  (1 unrouted)

## Text on the board
tNames: 5V | GND | GND | 5V | GND | CFO EUROPROTO2